# Altium PCB PCB3.PcbDoc
Units mm, origin at the board's own origin, x right, y up, seen from the top; angles counter-clockwise.
Board outline 46.23 x 30.35 mm, 2 copper layers (Top Layer, Bottom Layer); 10 components, 8 nets, 31 pads, 0 vias.
Unrouted connection lines stored in the file: 1.
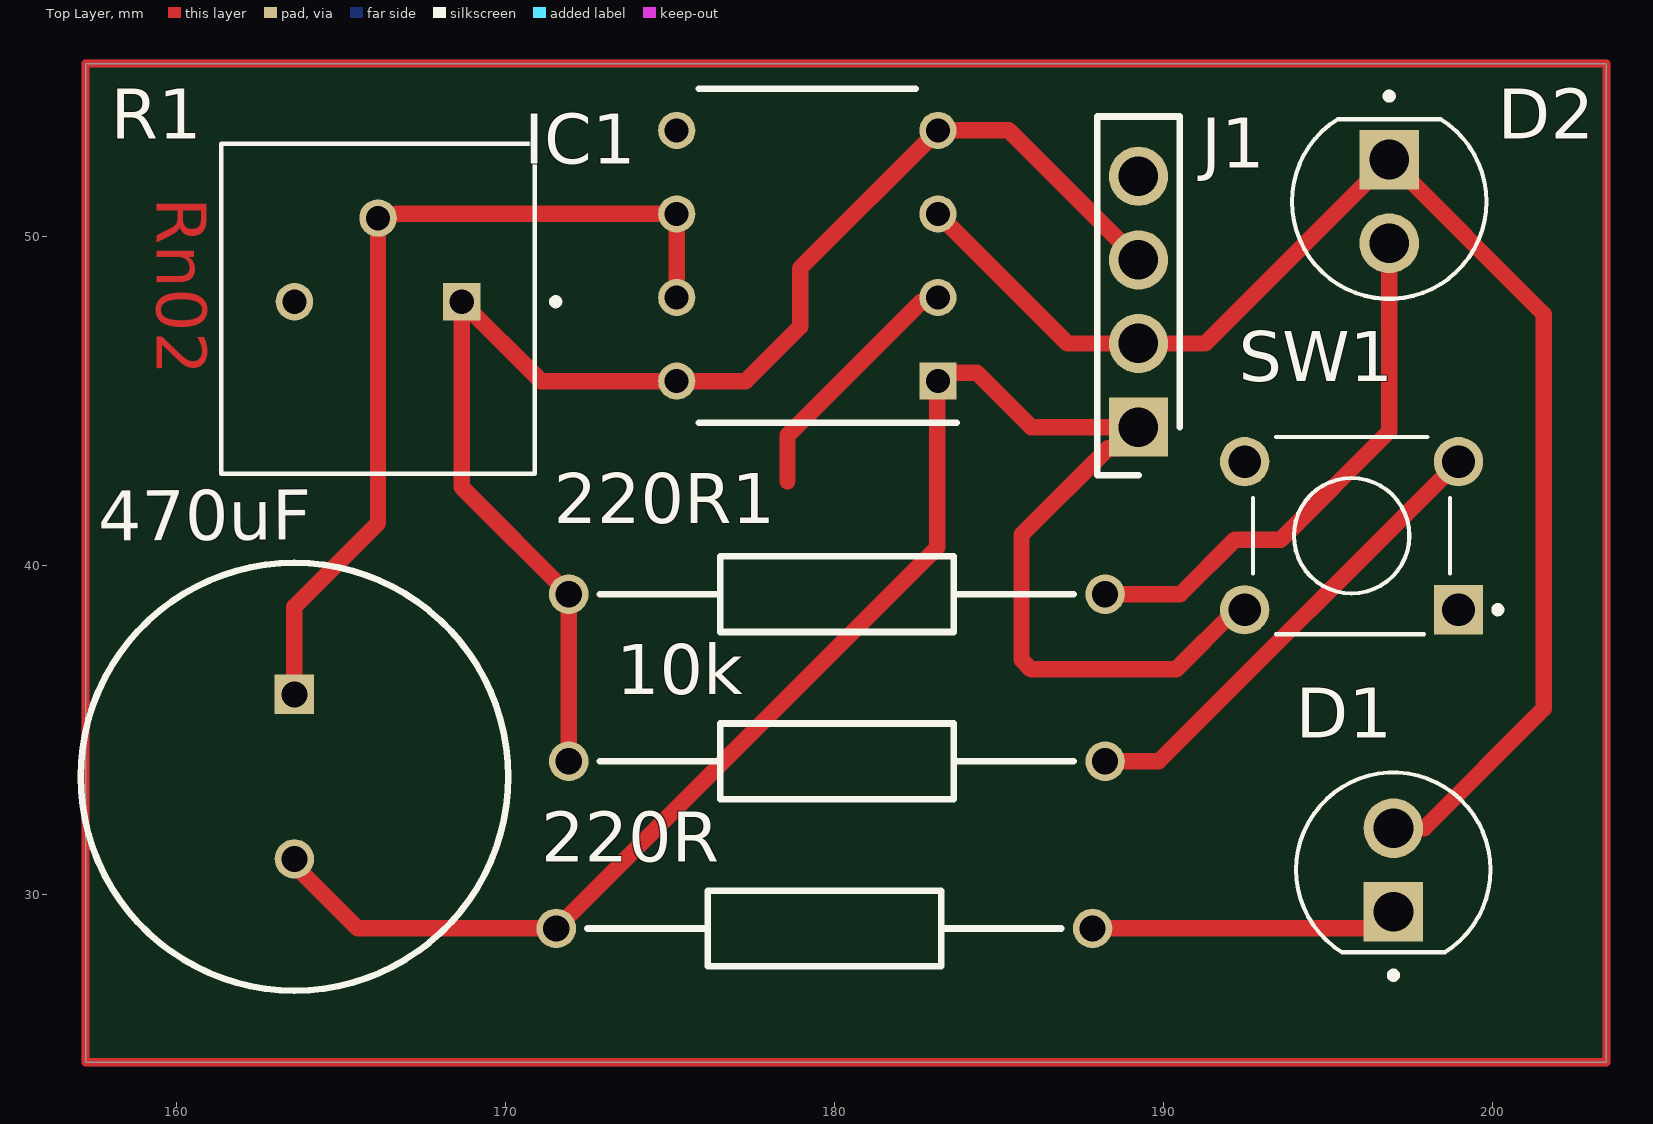
[diagram p0: Top Layer view]
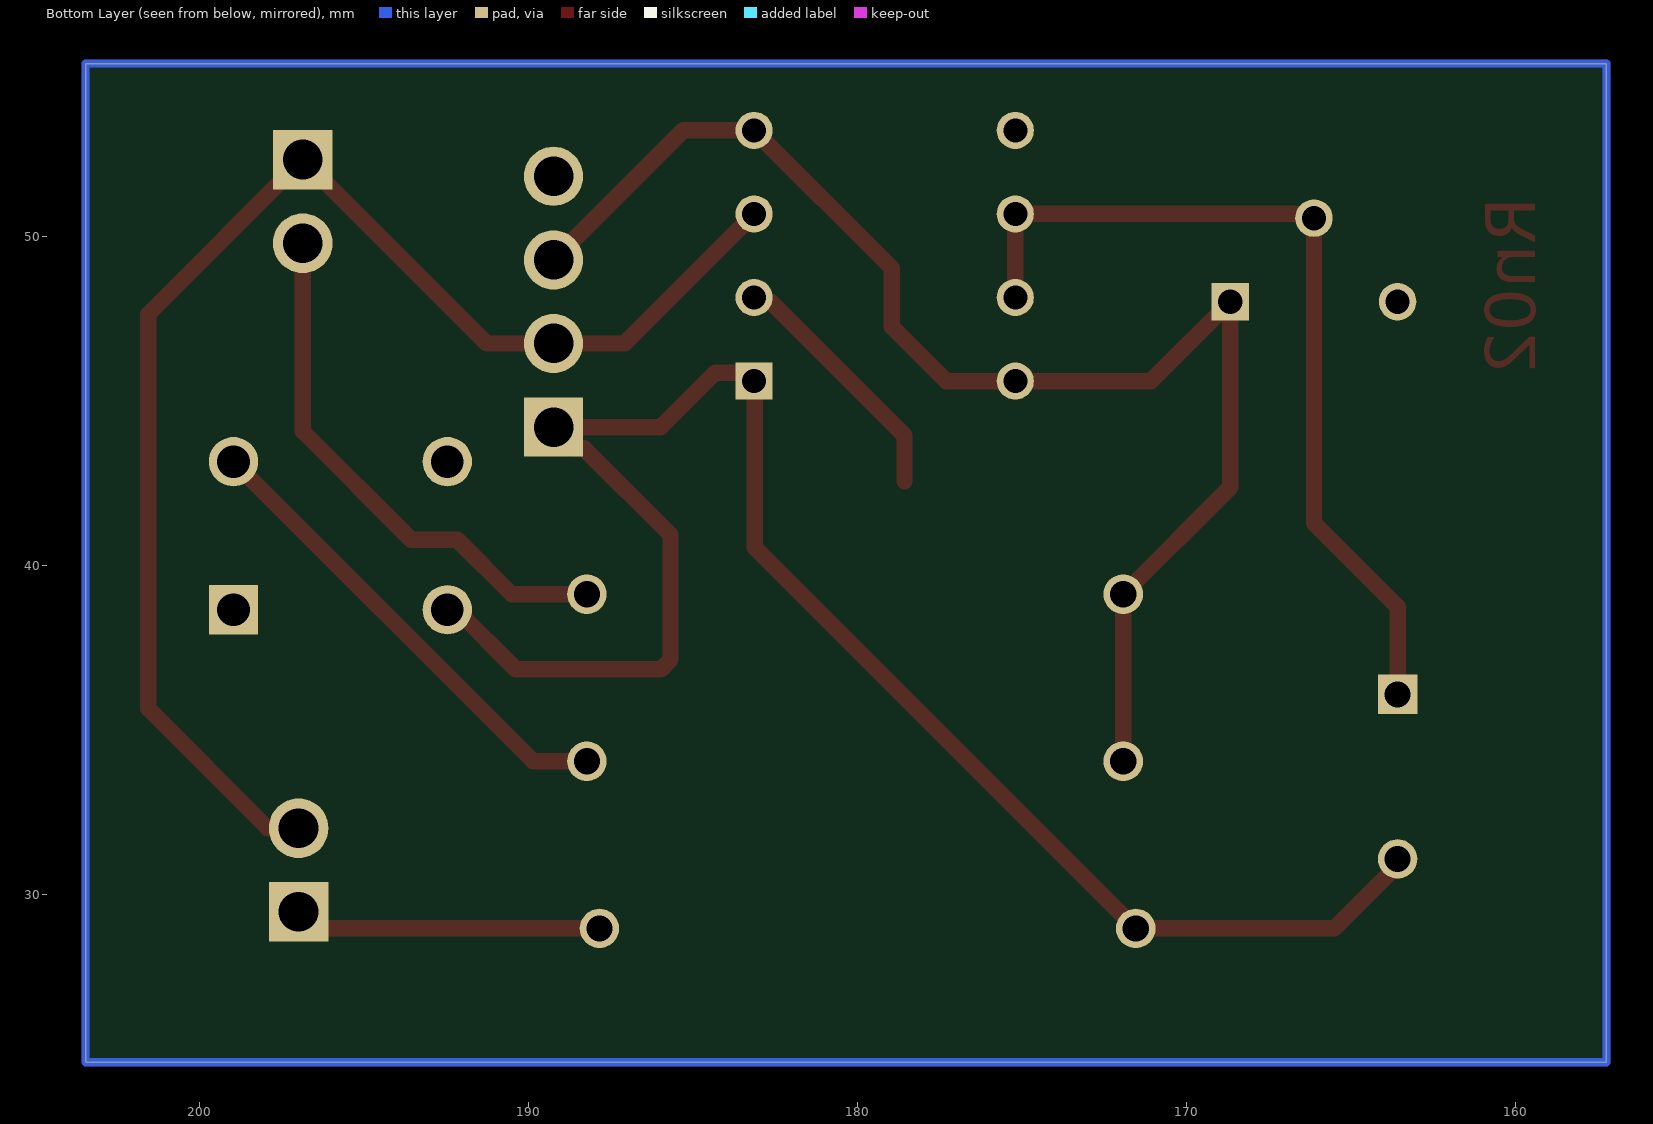
[diagram p1: Bottom Layer view, seen from below]
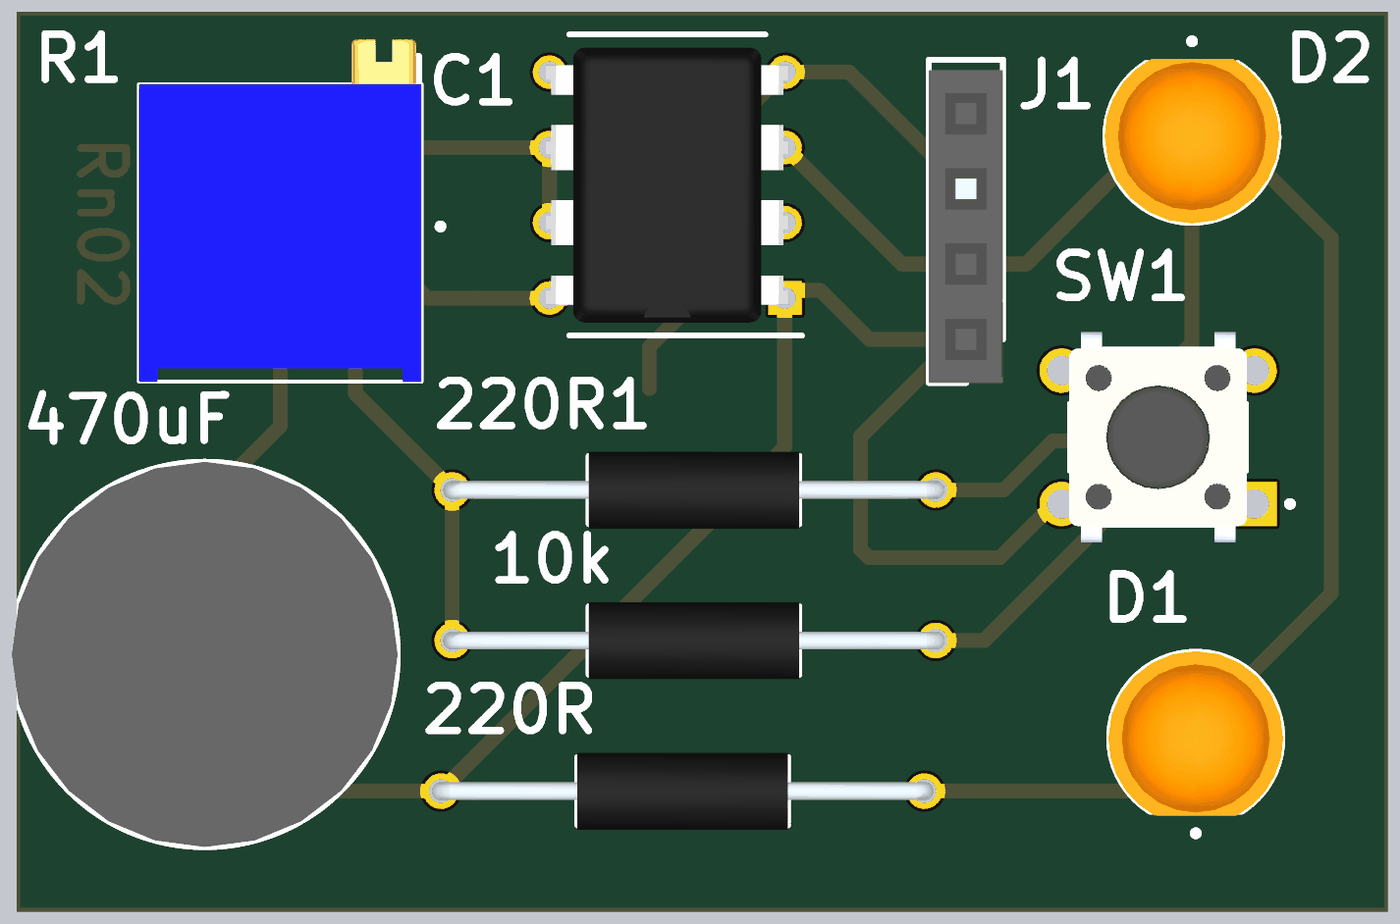
[diagram p2: 3D render of the assembled board from above, using the file's embedded part models]

## Layer stack, top to bottom
Top Solder: solder mask 0.0102, Solder Resist, Dk 3.5
Top Layer: signal copper 0.0356
Dielectric 1: dielectric 0.32, FR-4, Dk 4.8
Bottom Layer: signal copper 0.0356
Bottom Solder: solder mask 0.0102, Solder Resist, Dk 3.5

## Board outline
157.226,24.892 203.454,24.892 203.454,55.245 157.226,55.245

## Design rules (kind name [scope] priority, off if disabled: settings)
Clearance [All] p1: gap=0.254 ignorepadtopadclearanceinfootprint=FALSE
HoleSize [All] p1: absolutevalues=FALSE maxlimit=2.54 minlimit=0.025 maxpercent=80.000 minpercent=40.000
PolygonConnect [All] p1: connectstyle=Relief reliefconductorwidth=0.254 reliefentries=4 polygonreliefangle="90 Angle" airgapwidth=0.254
RoutingVias [All] p1: holewidth=0.711 width=1.27 viastyle="Through Hole" minholewidth=0.711 minwidth=1.27 maxholewidth=0.711 maxwidth=1.27
SilkToSolderMaskClearance [IsPad] p1: minsilkscreentomaskgap=0.1 clearancetoexposedcopper=TRUE
SolderMaskExpansion [All] p1: expansion=0.102 istentingtop=FALSE
SupplyNets "Schematic Supply Nets_1" [InNet('GND')] p1: voltage=0.000
SupplyNets "Schematic Supply Nets" [InNet('+5')] p2: voltage=0.000
Width [All] p1: maxlimit=1 minlimit=0.254 preferedwidth=0.5
28 further rules are at their usual default settings.

## Classes and differential pairs
component class Sheet2: 10k 220R 220R1 470uF D1 D2 J1 R1 SW1

## Components (designator, comment, footprint, x,y, rotation, side; value= is the part's Value field where it differs from the comment)
10k "MF1_4DCT26A1001F" RESAD1630W60L710D230 188.214,34.036 r180 top
220R "MF1_4DCT26A1001F" RESAD1630W60L710D230 171.533,28.956 r0 top
220R1 "MF1_4DCT26A1001F" RESAD1630W60L710D230 188.214,39.116 r180 top
470uF "MAL217058471E3" CAPPRD500W60D1300H2700 163.576,36.068 r270 top
D1 "L08R5000Q1" LEDRD254W57D500H1070 196.977,30.734 r90 top
D2 "L08R5000Q1" LEDRD254W57D500H1070 196.85,51.054 r270 top
IC1 "LM555CN_NOPB" DIP794W53P254L959H508Q8N 179.164,49.403 r180 top
J1 "M20-7820446" RHDR4W70P0X254_1X4_1056X250X865P 189.23,44.196 r90 top
R1 "3296P-1-105" TRIM_3296P-1-105 166.116,48.006 r180 top
SW1 "1825910-6" SW_1825910-6-4 195.707,40.894 r180 top

## Footprints (in the part's own frame and the unit in brackets; to place one, negate y for a bottom-side part, rotate by r counter-clockwise, add the part's x,y. Pads: shape width x height; smd on the part's side, far side on the other; paste and mask are expansions set on the pad)
CAPPRD500W60D1300H2700 [mm]
  rect 1.2x1.2 hole 0.8: 1(0,0)
  round 1.2 hole 0.8: 2(5,0)
  silkscreen extent -4,-6.5 9,6.5, body extent -3.99,-6.5 9,6.5, height 27
DIP794W53P254L959H508Q8N [mm]
  rect 1.13x1.13 hole 0.73: 1(-3.97,3.81)
  round 1.13 hole 0.73: 2(-3.97,1.27) 3(-3.97,-1.27) 4(-3.97,-3.81) 5(3.97,-3.81) 6(3.97,-1.27) 7(3.97,1.27) 8(3.97,3.81)
  silkscreen extent -4.53,-5.08 3.3,5.08, body extent -4.1,-4.64 4.1,4.64, height 4.21
LEDRD254W57D500H1070 [mm]
  round 1.815 hole 1.21: A(1.27,0)
  rect 1.815x1.815 / inner round 1.815 / far side rect 1.815x1.815 hole 1.21: C(-1.27,0)
  silkscreen extent -3.3,-2.96 2.96,2.96, body extent -2.6,-2.95 2.95,2.95, height 9.1
RESAD1630W60L710D230 [mm]
  round 1.2 hole 0.8: 1(0,0) 2(16.3,0)
  silkscreen extent 0.95,-1.15 15.35,1.15, body extent -0.3,-1.29 16.6,1.29, height 2.6
RHDR4W70P0X254_1X4_1056X250X865P [mm]
  rect 1.8x1.8 hole 1.2: 1(0,0)
  round 1.8 hole 1.2: 2(2.54,0) 3(5.08,0) 4(7.62,0)
  silkscreen extent -1.47,-1.25 9.44,1.25, body extent -1.47,-1.25 9.09,1.25, height 8.65
SW_1825910-6-4 [mm]
  rect 1.498x1.498 / inner round 1.498 / far side rect 1.498x1.498 hole 0.99: 1(-3.25,2.25)
  round 1.498 hole 0.99: 2(3.25,2.25) 3(-3.25,-2.25) 4(3.25,-2.25)
  silkscreen extent -4.54,-3 3,3, body extent -3,-3.9 3,3.9, height 5.01
TRIM_3296P-1-105 [mm]
  rect 1.14x1.14 / inner round 1.14 / far side rect 1.14x1.14 hole 0.74: 1(-2.54,0)
  round 1.14 hole 0.74: 2(0,-2.54) 3(2.54,0)
  silkscreen extent -5.5,-4.8 4.76,5.23, body extent -4.76,-6.32 4.76,5.23, height 4.96

## Part data
10k 220R 220R1: "Resistor", Manufacturer_Name="KOA Speer", Manufacturer_Part_Number=MF1/4DCT26A1001F, Mouser Part Number=660-MF1/4DCT26A1001F, Datasheet Link=https://componentsearchengine.com/Datasheets/1/MF1_4DCT26A1001F.pdf, Mouser Price/Stock=https://www.mouser.co.uk/ProductDetail/KOA-Speer/MF1-4DCT26A1001F?qs=wVGympPcmnD9Oav1Pii0SQ%3D%3D
470uF: "Capacitor Polarised", Manufacturer_Name=Vishay, Mouser Part Number=594-MAL217058471E3, Datasheet Link=https://www.mouser.com/datasheet/2/177/186_187-948805.pdf, Height=27mm, Manufacturer_Part_Number=MAL217058471E3, Mouser Price/Stock=https://www.mouser.co.uk/ProductDetail/Vishay-BC-Components/MAL217058471E3?qs=eP2BKZSCXI7oGPzw3Bg59Q%3D%3D
D1 D2: "LED, 5MM, ORANGE; LED / Lamp Size: 5mm / T-1 3/4; LED Colour: Orange; Typ Luminous Intensity: 4.3mcd; Viewing Angle: ...", Package=None, Availability="In Stock", Check_prices=https://www.snapeda.com/parts/L08R5000Q1/LED+Technology/view-part/?ref=eda, MF="LED Technology", MP=L08R5000Q1, Price=None, SnapEDA_Link=https://www.snapeda.com/parts/L08R5000Q1/LED+Technology/view-part/?ref=snap
IC1: "Integrated Circuit", Arrow Part Number=LM555CN/NOPB, Manufacturer_Name="Texas Instruments", Mouser Part Number=926-LM555CN/NOPB, Arrow Price/Stock=https://www.arrow.com/en/products/lm555cnnopb/texas-instruments?region=nac, Datasheet Link=https://datasheet.datasheetarchive.com/originals/distributors/Datasheets-SFU2/DSASFU100035550.pdf, Height=5.08mm, Manufacturer_Part_Number=LM555CN/NOPB, Mouser Price/Stock=https://www.mouser.co.uk/ProductDetail/Texas-Instruments/LM555CN-NOPB?qs=QbsRYf82W3GjZpQL%2FakZOg%3D%3D
J1: "Connector", Manufacturer_Name=Harwin, Mouser Part Number=855-M20-7820446, Datasheet Link=https://cdn.harwin.com/pdfs/M20-782.pdf, Height=8.65mm, Manufacturer_Part_Number=M20-7820446, Mouser Price/Stock=https://www.mouser.co.uk/ProductDetail/Harwin/M20-7820446?qs=vF78I%252BjhbY8%252Bno0H8mp9XA%3D%3D
R1: "1 kOhms 0.5W, 1/2W PC Pins Through Hole Trimmer Potentiometer Cermet 25 Turn Side Adjustment", Package=None, Availability=Unavailable, MP=altium_native_batch, Price=None
SW1: "Switch Push Button OFF (ON) SPST Round Button 0.05A 24VDC Momentary Contact PC Pins Thru-Hole", Package=None, Check_prices=https://www.snapeda.com/parts/1825910-6/TE+Connectivity+ALCOSWITCH+Switches/view-part/?ref=eda, Digi-Key_Part_Number=450-1650-ND, MF="TE Connectivity", MP=1825910-6, Purchase-URL=https://pricing.snapeda.com/search/part/1825910-6/?ref=eda, SnapEDA_Link=https://www.snapeda.com/parts/1825910-6/TE+Connectivity+ALCOSWITCH+Switches/view-part/?ref=snap

## Nets (pads, with @x,y where several pads share a name; then routed paths per layer and width w, separated by ;. In a path a pad name is that pad's centre, name@x,y a point inside that pad or via, vN(x,y) a via of type N, cw(c..) or ccw(c..) an arc to the next point about the centre after c; other vN are vias at no path point)
+5: 10k.2 220R1.2 IC1.4 IC1.8 J1.3 R1.1 | length 43.1
  Top Layer w0.5: 10k.2 220R1.2 168.656,42.374 R1.1 171.069,45.593 IC1.8 177.292,45.593 178.943,47.244 178.943,49.022 IC1.4 185.293,53.213 J1.3 J1.3@188.878,49.276
GND: 220R.1 470uF.2 IC1.1 J1.1 SW1.2 | length 53.6
  Top Layer w0.5: 470uF.2 163.576,30.879 165.499,28.956 220R.1 183.119,40.542 183.119,45.747 183.219,45.847 183.769,45.847 184.319,45.847 185.97,44.196 J1.1@188.95,44.196 ; J1.1 J1.1@188.95,44.196 ; SW1.2 192.187,38.644 190.373,36.83 185.967,36.83 185.674,37.123 185.674,40.92 188.3,43.546 188.58,43.546 188.95,43.916 J1.1@188.95,44.196
Net10k_1: 10k.1 SW1.3 | length 14.5
  Top Layer w0.5: 10k.1 189.849,34.036 SW1.3
Net220R1_1: 220R1.1 D2.A | length 16.4
  Top Layer w0.5: 220R1.1 190.5,39.116 192.151,40.767 193.548,40.767 196.85,44.069 D2.A
Net220R_2: 220R.2 D1.C | length 9.4
  Top Layer w0.381: D1.C@196.469,28.956 D1.C
  Top Layer w0.5: 220R.2 D1.C@196.469,28.956
Net470uF_1: 470uF.1 IC1.6 IC1.7 R1.2 | length 27.2
  Top Layer w0.5: 470uF.1 163.576,38.735 166.116,41.275 R1.2 166.238,50.668 166.691,50.668 166.696,50.673 IC1.6 IC1.7
NetD1_A: D1.A D2.C IC1.3 J1.2 | length 42.4
  Top Layer w0.5: IC1.3 187.071,46.736 J1.2 191.262,46.736 D2.C 201.549,47.625 201.549,35.638 197.915,32.004 D1.A
NetIC1_2: IC1.2 SW1.4 | length 7.7
  Top Layer w0.5: 178.562,42.545 178.562,43.942 182.632,48.012 183.013,48.012 IC1.2
pads on no net: IC1.5 J1.4 R1.3 SW1.1

## Other copper
Top Layer:
  text "Rn02" at 159.385,51.181 h1.52 r270
Multi-Layer:
  lines w0.254: 157.226,24.892 203.454,24.892 203.454,55.245 201.676,55.245 157.226,55.245 157.226,24.892